# EAGLE board IOB-I2C-MCP23017_array (EAGLE 7.7.0)
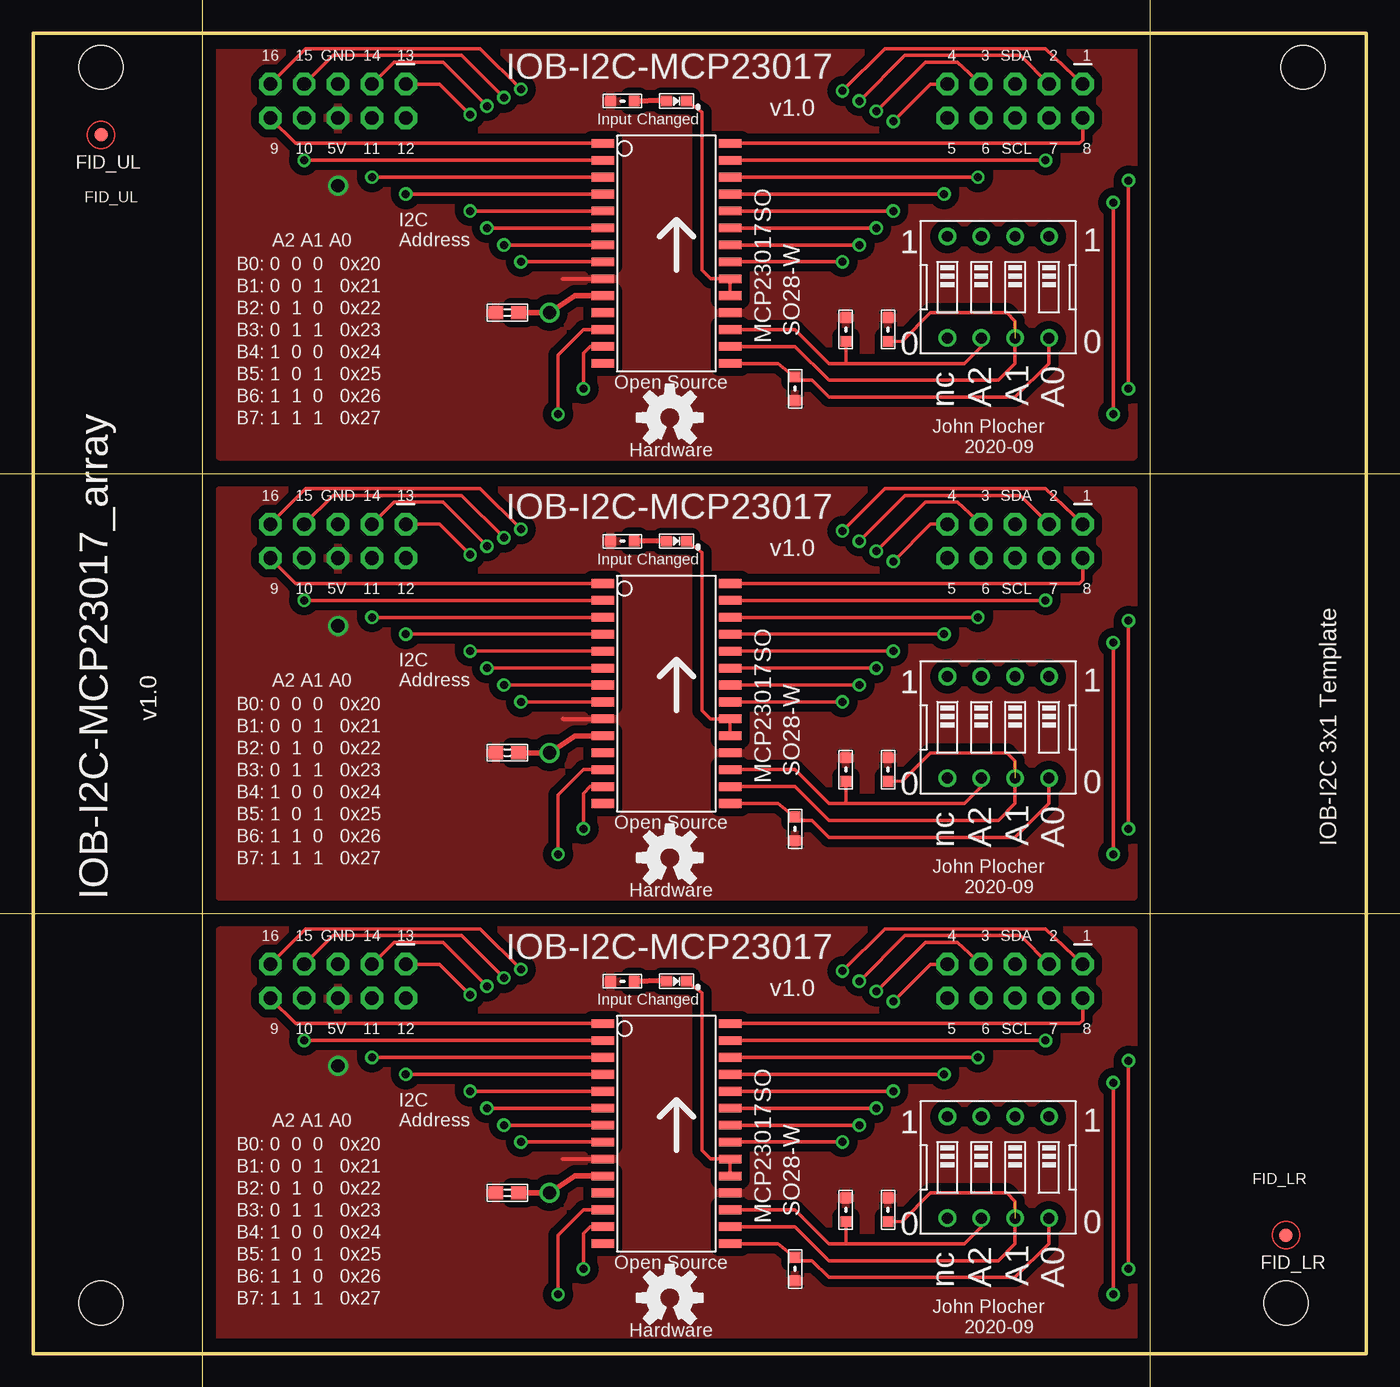
[diagram p0: board, top side]
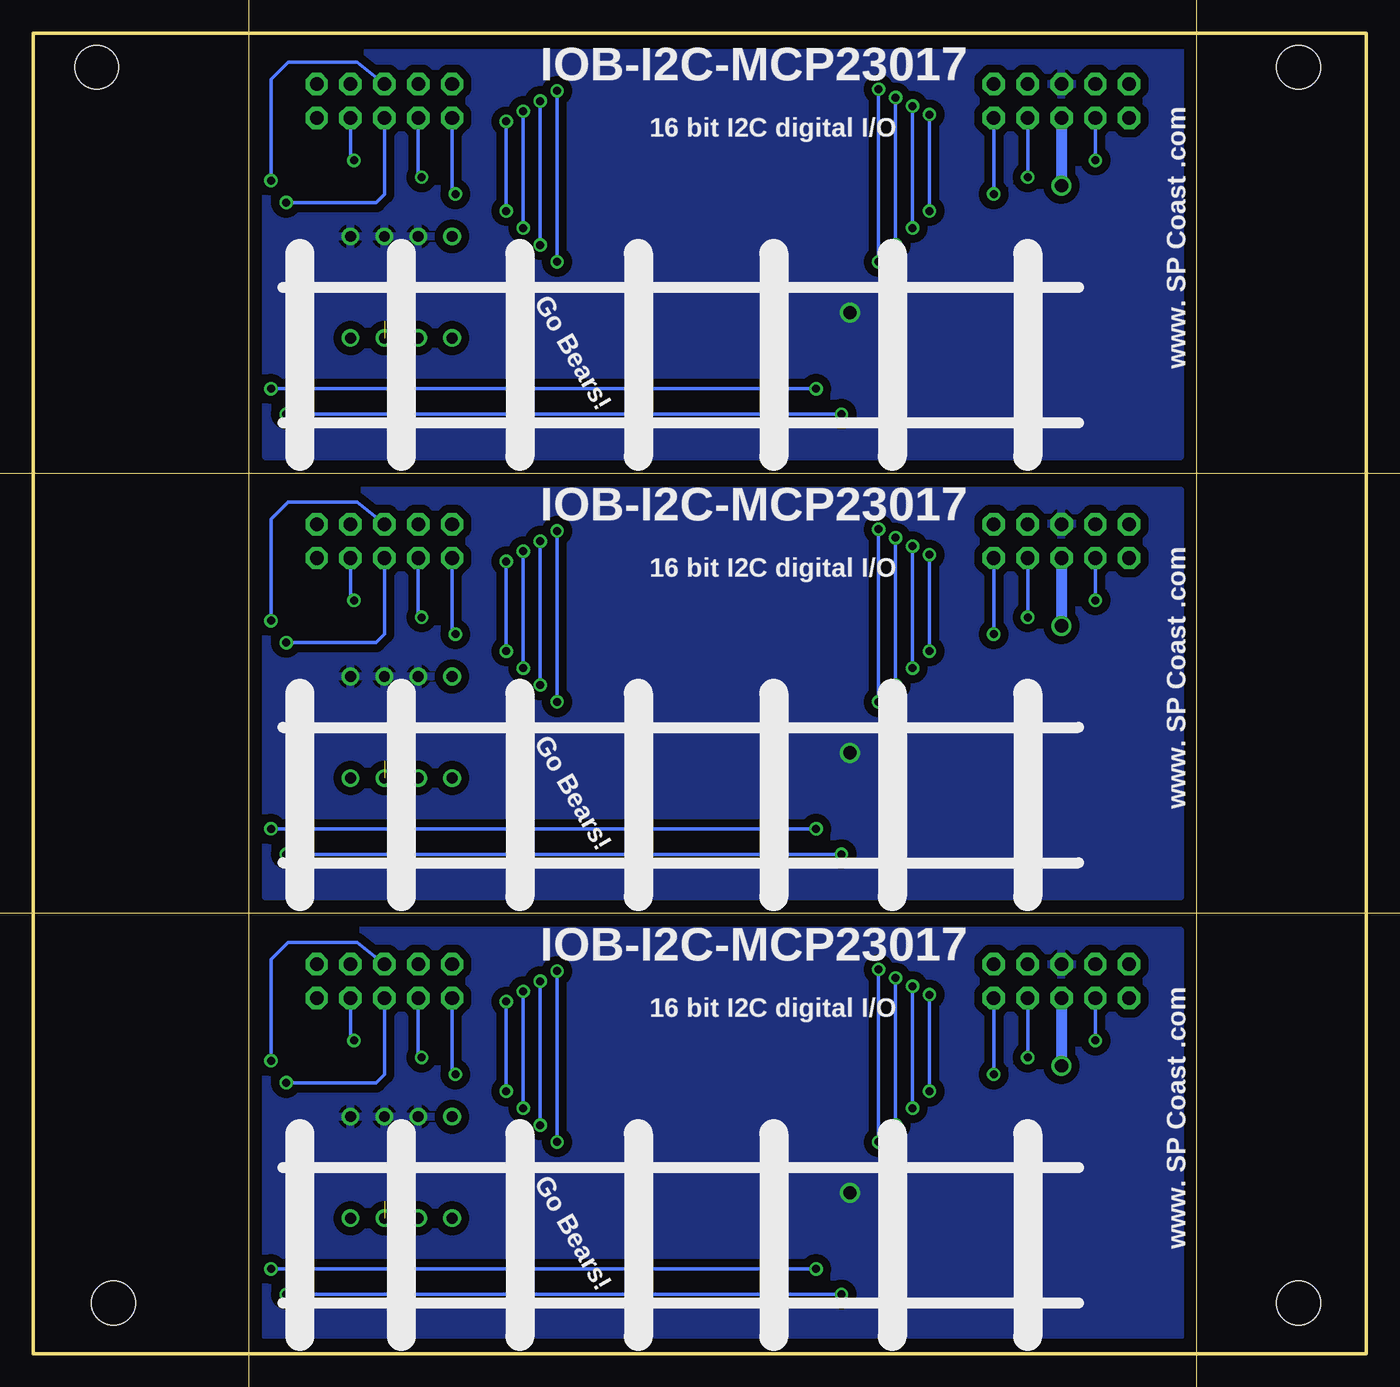
[diagram p1: board, bottom side, seen from below]

Size 100 x 99.06 mm. Coordinates in mm from the lower left corner, seen from the top.
Copper layers (1*16): Top 0.035mm / dielectric 1.5mm / Bottom 0.035mm
Design rules "default": minimum track width 10mil, minimum drill 0.6mm, track to track 8mil, track to pad 8mil, pad to pad 8mil, via to via 8mil, smd to smd 8mil, copper to edge 40mil, drill to drill 8mil, minimum pad ring 10mil, minimum via ring 8mil, stop-mask expansion 4mil, vias tented up to drill 0mil, thermal gap 10mil
Milling: 2 lines

## Footprints (pad centres in the part's own frame; a part is rotated, then mirrored left to right if it is on the bottom)
I2C-EXPANDER = drill 1.016 pad 1.676 octagon: 1 30.48,1.27; 2 27.94,1.27; 3 22.86,1.27; 4 20.32,1.27; 5 20.32,-1.27; 6 22.86,-1.27; 7 27.94,-1.27; 8 30.48,-1.27; 9 -30.48,-1.27; 10 -27.94,-1.27; 11 -22.86,-1.27; 12 -20.32,-1.27; 13 -20.32,1.27; 14 -22.86,1.27; 15 -27.94,1.27; 16 -30.48,1.27; GND -25.4,1.27; SCL 25.4,-1.27; SDA 25.4,1.27; VCC -25.4,-1.27
0603-CAP = smd 1.1 x 1: 1 -0.85,0; 2 0.85,0
FIDUCIAL_1MM = smd 1 x 1: 1 0,0
SO28W = smd 0.65 x 1.7: 1 -7.62,-4.78; 2 -6.35,-4.78; 3 -5.08,-4.78; 4 -3.81,-4.78; 5 -2.54,-4.78; 6 -1.27,-4.78; 7 0,-4.78; 8 1.27,-4.78; 9 2.54,-4.78; 10 3.81,-4.78; 11 5.08,-4.78; 12 6.35,-4.78; 13 7.62,-4.78; 14 8.89,-4.78; 15 8.89,4.78; 16 7.62,4.78; 17 6.35,4.78; 18 5.08,4.78; 19 3.81,4.78; 20 2.54,4.78; 21 1.27,4.78; 22 0,4.78; 23 -1.27,4.78; 24 -2.54,4.78; 25 -3.81,4.78; 26 -5.08,4.78; 27 -6.35,4.78; 28 -7.62,4.78
0603-LED = smd 0.8 x 0.8: A 0.75,0; C -0.75,0
0603-RES = smd 0.813 x 0.813: 1 -0.889,0; 2 0.889,0
EDG-04 = drill 0.813: 1 -3.81,-3.81; 2 -1.27,-3.81; 3 1.27,-3.81; 4 3.81,-3.81; 5 3.81,3.81; 6 1.27,3.81; 7 -1.27,3.81; 8 -3.81,3.81
BOARD-TEMPLATE-IOB-I2C-3X1-ARRAY = hole 3.3: 5.08,96.52; 95.25,96.52; 93.98,3.81; 5.08,3.81

## Placement (x,y rotation side)
BOARDX11  CONNECTOR-I2C-EXPANDER  [I2C-EXPANDER]  48.26,27.94 0 top
BOARDX12  CONNECTOR-I2C-EXPANDER  [I2C-EXPANDER]  48.26,60.96 0 top
BOARDX13  CONNECTOR-I2C-EXPANDER  [I2C-EXPANDER]  48.26,93.98 0 top
C1X11  0.1uF  [0603-CAP]  35.56,12.06 0 top
C1X12  0.1uF  [0603-CAP]  35.56,45.09 0 top
C1X13  0.1uF  [0603-CAP]  35.56,78.11 0 top
FID_LR  FIDUCIAL  [FIDUCIAL_1MM]  93.98,8.89 0 top
FID_UL  FIDUCIAL  [FIDUCIAL_1MM]  5.08,91.44 0 top
IC1X11  MCP23017SO  [SO28W]  47.5,17.14 270 top
IC1X12  MCP23017SO  [SO28W]  47.5,50.16 270 top
IC1X13  MCP23017SO  [SO28W]  47.5,83.19 270 top
LED1X11  G  [0603-LED]  48.26,27.94 180 top
LED1X12  G  [0603-LED]  48.26,60.96 180 top
LED1X13  G  [0603-LED]  48.26,93.98 180 top
OSHW1X11  DOC-OSHW-LOGO-M  [OSHW-LOGO-M]  47.75,4.19 0 top
OSHW1X12  DOC-OSHW-LOGO-M  [OSHW-LOGO-M]  47.75,37.21 0 top
OSHW1X13  DOC-OSHW-LOGO-M  [OSHW-LOGO-M]  47.75,70.23 0 top
R1X11  10K  [0603-RES]  57.15,6.35 270 top
R1X12  10K  [0603-RES]  57.15,39.37 270 top
R1X13  10K  [0603-RES]  57.15,72.39 270 top
R2X11  10K  [0603-RES]  64.14,10.79 90 top
R2X12  10K  [0603-RES]  64.14,43.81 90 top
R2X13  10K  [0603-RES]  64.14,76.83 90 top
R3X11  10K  [0603-RES]  60.96,10.79 90 top
R3X12  10K  [0603-RES]  60.96,43.81 90 top
R3X13  10K  [0603-RES]  60.96,76.83 90 top
R4X11  4k7  [0603-RES]  44.2,27.94 180 top
R4X12  4k7  [0603-RES]  44.2,60.96 180 top
R4X13  4k7  [0603-RES]  44.2,93.98 180 top
SW1X11  SPSTx4  [EDG-04]  72.39,13.97 180 top
SW1X12  SPSTx4  [EDG-04]  72.39,46.99 180 top
SW1X13  SPSTx4  [EDG-04]  72.39,80.01 180 top
U$5X1  BOARD  [BOARD-TEMPLATE-IOB-I2C-3X1-ARRAY]  0,0 0 top

## Library data of the parts
BOARDX11-BOARDX13 C1X11-C1X13 FID_LR FID_UL LED1X11-LED1X13 OSHW1X11-OSHW1X13 R1X11-R1X13 R2X11-R2X13 R3X11-R3X13 R4X11-R4X13 SW1X11-SW1X13 U$5X1 = SPCoast
IC1X11-IC1X13 = microchip

## Nets
A0X11: IC1X11.15 R1X11.1 SW1X11.8
A0X12: IC1X12.15 R1X12.1 SW1X12.8
A0X13: IC1X13.15 R1X13.1 SW1X13.8
A1X11: IC1X11.16 R2X11.1 SW1X11.7
A1X12: IC1X12.16 R2X12.1 SW1X12.7
A1X13: IC1X13.16 R2X13.1 SW1X13.7
A3X11: IC1X11.17 R3X11.1 SW1X11.6
A3X12: IC1X12.17 R3X12.1 SW1X12.6
A3X13: IC1X13.17 R3X13.1 SW1X13.6
GNDX11: BOARDX11.GND C1X11.2 IC1X11.10 SW1X11.1 SW1X11.2 SW1X11.3
GNDX12: BOARDX12.GND C1X12.2 IC1X12.10 SW1X12.1 SW1X12.2 SW1X12.3
GNDX13: BOARDX13.GND C1X13.2 IC1X13.10 SW1X13.1 SW1X13.2 SW1X13.3
N$1X11: LED1X11.A R4X11.1
N$1X12: LED1X12.A R4X12.1
N$1X13: LED1X13.A R4X13.1
N$2X11: IC1X11.19 IC1X11.20 LED1X11.C
N$2X12: IC1X12.19 IC1X12.20 LED1X12.C
N$2X13: IC1X13.19 IC1X13.20 LED1X13.C
P1X11: BOARDX11.1 IC1X11.21
P1X12: BOARDX12.1 IC1X12.21
P1X13: BOARDX13.1 IC1X13.21
P2X11: BOARDX11.2 IC1X11.22
P2X12: BOARDX12.2 IC1X12.22
P2X13: BOARDX13.2 IC1X13.22
P3X11: BOARDX11.3 IC1X11.23
P3X12: BOARDX12.3 IC1X12.23
P3X13: BOARDX13.3 IC1X13.23
P4X11: BOARDX11.4 IC1X11.24
P4X12: BOARDX12.4 IC1X12.24
P4X13: BOARDX13.4 IC1X13.24
P5X11: BOARDX11.5 IC1X11.25
P5X12: BOARDX12.5 IC1X12.25
P5X13: BOARDX13.5 IC1X13.25
P6X11: BOARDX11.6 IC1X11.26
P6X12: BOARDX12.6 IC1X12.26
P6X13: BOARDX13.6 IC1X13.26
P7X11: BOARDX11.7 IC1X11.27
P7X12: BOARDX12.7 IC1X12.27
P7X13: BOARDX13.7 IC1X13.27
P8X11: BOARDX11.8 IC1X11.28
P8X12: BOARDX12.8 IC1X12.28
P8X13: BOARDX13.8 IC1X13.28
P9X11: BOARDX11.9 IC1X11.1
P9X12: BOARDX12.9 IC1X12.1
P9X13: BOARDX13.9 IC1X13.1
P10X11: BOARDX11.10 IC1X11.2
P10X12: BOARDX12.10 IC1X12.2
P10X13: BOARDX13.10 IC1X13.2
P11X11: BOARDX11.11 IC1X11.3
P11X12: BOARDX12.11 IC1X12.3
P11X13: BOARDX13.11 IC1X13.3
P12X11: BOARDX11.12 IC1X11.4
P12X12: BOARDX12.12 IC1X12.4
P12X13: BOARDX13.12 IC1X13.4
P13X11: BOARDX11.13 IC1X11.5
P13X12: BOARDX12.13 IC1X12.5
P13X13: BOARDX13.13 IC1X13.5
P14X11: BOARDX11.14 IC1X11.6
P14X12: BOARDX12.14 IC1X12.6
P14X13: BOARDX13.14 IC1X13.6
P15X11: BOARDX11.15 IC1X11.7
P15X12: BOARDX12.15 IC1X12.7
P15X13: BOARDX13.15 IC1X13.7
P16X11: BOARDX11.16 IC1X11.8
P16X12: BOARDX12.16 IC1X12.8
P16X13: BOARDX13.16 IC1X13.8
SCLX11: BOARDX11.SCL IC1X11.12
SCLX12: BOARDX12.SCL IC1X12.12
SCLX13: BOARDX13.SCL IC1X13.12
SDAX11: BOARDX11.SDA IC1X11.13
SDAX12: BOARDX12.SDA IC1X12.13
SDAX13: BOARDX13.SDA IC1X13.13
VCCX11: BOARDX11.VCC C1X11.1 IC1X11.9 IC1X11.18 R1X11.2 R2X11.2 R3X11.2 R4X11.2
VCCX12: BOARDX12.VCC C1X12.1 IC1X12.9 IC1X12.18 R1X12.2 R2X12.2 R3X12.2 R4X12.2
VCCX13: BOARDX13.VCC C1X13.1 IC1X13.9 IC1X13.18 R1X13.2 R2X13.2 R3X13.2 R4X13.2

## Tracks (layer width: path | path; a pad name or v marks a point on that pad's centre or on a via)
A0X11
  Top 0.254: IC1X11.15 55.88,8.26 R1X11.1 57.37,6.99 58.42,6.99 59.69,5.71 73.66,5.71 76.2,8.26 SW1X11.8
A0X12
  Top 0.254: IC1X12.15 55.88,41.27 R1X12.1 57.37,40.01 58.42,40.01 59.69,38.73 73.66,38.73 76.2,41.27 SW1X12.8
A0X13
  Top 0.254: IC1X13.15 55.88,74.3 R1X13.1 57.37,73.03 58.42,73.03 59.69,71.75 73.66,71.75 76.2,74.3 SW1X13.8
A1X11  (1 unrouted)
  Top 0.254: IC1X11.16 57.15,9.53 59.69,6.99 72.39,6.99 73.66,8.26 73.66,11.43 73.03,12.06 67.31,12.06 65.19,9.95 R2X11.1
A1X12  (1 unrouted)
  Top 0.254: IC1X12.16 57.15,42.55 59.69,40.01 72.39,40.01 73.66,41.27 73.66,44.45 73.03,45.09 67.31,45.09 65.19,42.97 R2X12.1
A1X13  (1 unrouted)
  Top 0.254: IC1X13.16 57.15,75.56 59.69,73.03 72.39,73.03 73.66,74.3 73.66,77.47 73.03,78.11 67.31,78.11 65.19,75.98 R2X13.1
A3X11
  Top 0.254: IC1X11.17 57.15,10.79 59.69,8.26 60.96,8.26 | 60.96,8.26 69.85,8.26 71.12,9.53 SW1X11.6 | R3X11.1 60.96,8.26
A3X12
  Top 0.254: IC1X12.17 57.15,43.81 59.69,41.27 60.96,41.27 | 60.96,41.27 69.85,41.27 71.12,42.55 SW1X12.6 | R3X12.1 60.96,41.27
A3X13
  Top 0.254: IC1X13.17 57.15,76.83 59.69,74.3 60.96,74.3 | 60.96,74.3 69.85,74.3 71.12,75.56 SW1X13.6 | R3X13.1 60.96,74.3
GNDX11  (via drill 1 pad 1.5)
  Top 0.406: IC1X11.10 40.64,13.34 v38.73,12.06 C1X11.2
  pour Bottom (isolate 0.61): 13.97,31.75 13.97,1.27 82.55,1.27 82.55,31.75
GNDX12  (via drill 1 pad 1.5)
  Top 0.406: IC1X12.10 40.64,46.35 v38.73,45.09 C1X12.2
  pour Bottom (isolate 0.61): 13.97,64.77 13.97,34.29 82.55,34.29 82.55,64.77
GNDX13  (via drill 1 pad 1.5)
  Top 0.406: IC1X13.10 40.64,79.38 v38.73,78.11 C1X13.2
  pour Bottom (isolate 0.61): 13.97,97.79 13.97,67.31 82.55,67.31 82.55,97.79
N$1X11
  Top 0.406: LED1X11.A 47.21,27.99 R4X11.1
N$1X12
  Top 0.406: LED1X12.A 47.21,61.01 R4X12.1
N$1X13
  Top 0.406: LED1X13.A 47.21,94.03 R4X13.1
N$2X11
  Top 0.254: IC1X11.19 IC1X11.20 50.8,14.61 50.16,15.24 50.16,27.09 LED1X11.C
N$2X12
  Top 0.254: IC1X12.19 IC1X12.20 50.8,47.62 50.16,48.26 50.16,60.1 LED1X12.C
N$2X13
  Top 0.254: IC1X13.19 IC1X13.20 50.8,80.64 50.16,81.28 50.16,93.12 LED1X13.C
P1X11  (via drill 0.6 pad 0.9)
  Top 0.254: IC1X11.21 v60.71,15.88 | BOARDX11.1 75.95,31.88 63.88,31.88 v60.71,28.7
  Bottom 0.254: v60.71,28.7 v60.71,15.88
P1X12  (via drill 0.6 pad 0.9)
  Top 0.254: IC1X12.21 v60.71,48.9 | BOARDX12.1 75.95,64.9 63.88,64.9 v60.71,61.72
  Bottom 0.254: v60.71,61.72 v60.71,48.9
P1X13  (via drill 0.6 pad 0.9)
  Top 0.254: IC1X13.21 v60.71,81.92 | BOARDX13.1 75.95,97.92 63.88,97.92 v60.71,94.74
  Bottom 0.254: v60.71,94.74 v60.71,81.92
P2X11  (via drill 0.6 pad 0.9)
  Top 0.254: IC1X11.22 v61.98,17.14 | BOARDX11.2 74.04,31.37 65.41,31.37 v61.98,27.94
  Bottom 0.254: v61.98,27.94 v61.98,17.14
P2X12  (via drill 0.6 pad 0.9)
  Top 0.254: IC1X12.22 v61.98,50.16 | BOARDX12.2 74.04,64.39 65.41,64.39 v61.98,60.96
  Bottom 0.254: v61.98,60.96 v61.98,50.16
P2X13  (via drill 0.6 pad 0.9)
  Top 0.254: IC1X13.22 v61.98,83.19 | BOARDX13.2 74.04,97.41 65.41,97.41 v61.98,93.98
  Bottom 0.254: v61.98,93.98 v61.98,83.19
P3X11  (via drill 0.6 pad 0.9)
  Top 0.254: IC1X11.23 v63.25,18.41 | BOARDX11.3 69.34,30.86 66.93,30.86 v63.25,27.18
  Bottom 0.254: v63.25,27.18 v63.25,18.41
P3X12  (via drill 0.6 pad 0.9)
  Top 0.254: IC1X12.23 v63.25,51.44 | BOARDX12.3 69.34,63.88 66.93,63.88 v63.25,60.2
  Bottom 0.254: v63.25,60.2 v63.25,51.44
P3X13  (via drill 0.6 pad 0.9)
  Top 0.254: IC1X13.23 v63.25,84.45 | BOARDX13.3 69.34,96.9 66.93,96.9 v63.25,93.22
  Bottom 0.254: v63.25,93.22 v63.25,84.45
P4X11  (via drill 0.6 pad 0.9)
  Top 0.254: IC1X11.24 v64.52,19.68 | BOARDX11.4 67.31,29.21 v64.52,26.42
  Bottom 0.254: v64.52,26.42 v64.52,19.68
P4X12  (via drill 0.6 pad 0.9)
  Top 0.254: IC1X12.24 v64.52,52.7 | BOARDX12.4 67.31,62.23 v64.52,59.44
  Bottom 0.254: v64.52,59.44 v64.52,52.7
P4X13  (via drill 0.6 pad 0.9)
  Top 0.254: IC1X13.24 v64.52,85.72 | BOARDX13.4 67.31,95.25 v64.52,92.46
  Bottom 0.254: v64.52,92.46 v64.52,85.72
P5X11  (via drill 0.6 pad 0.9)
  Top 0.254: IC1X11.25 v68.33,20.95
  Bottom 0.254: v68.33,20.95 68.58,21.21 BOARDX11.5
P5X12  (via drill 0.6 pad 0.9)
  Top 0.254: IC1X12.25 v68.33,53.98
  Bottom 0.254: v68.33,53.98 68.58,54.23 BOARDX12.5
P5X13  (via drill 0.6 pad 0.9)
  Top 0.254: IC1X13.25 v68.33,87
  Bottom 0.254: v68.33,87 68.58,87.25 BOARDX13.5
P6X11  (via drill 0.6 pad 0.9)
  Top 0.254: IC1X11.26 v70.87,22.23
  Bottom 0.254: v70.87,22.23 71.12,22.48 BOARDX11.6
P6X12  (via drill 0.6 pad 0.9)
  Top 0.254: IC1X12.26 v70.87,55.24
  Bottom 0.254: v70.87,55.24 71.12,55.5 BOARDX12.6
P6X13  (via drill 0.6 pad 0.9)
  Top 0.254: IC1X13.26 v70.87,88.27
  Bottom 0.254: v70.87,88.27 71.12,88.52 BOARDX13.6
P7X11  (via drill 0.6 pad 0.9)
  Top 0.254: IC1X11.27 v75.95,23.5
  Bottom 0.254: v75.95,23.5 76.2,23.75 BOARDX11.7
P7X12  (via drill 0.6 pad 0.9)
  Top 0.254: IC1X12.27 v75.95,56.52
  Bottom 0.254: v75.95,56.52 76.2,56.77 BOARDX12.7
P7X13  (via drill 0.6 pad 0.9)
  Top 0.254: IC1X13.27 v75.95,89.53
  Bottom 0.254: v75.95,89.53 76.2,89.79 BOARDX13.7
P8X11
  Top 0.254: IC1X11.28 78.49,24.77 78.74,25.02 BOARDX11.8
P8X12
  Top 0.254: IC1X12.28 78.49,57.78 78.74,58.04 BOARDX12.8
P8X13
  Top 0.254: IC1X13.28 78.49,90.81 78.74,91.06 BOARDX13.8
P9X11
  Top 0.254: IC1X11.1 19.68,24.77 BOARDX11.9
P9X12
  Top 0.254: IC1X12.1 19.68,57.78 BOARDX12.9
P9X13
  Top 0.254: IC1X13.1 19.68,90.81 BOARDX13.9
P10X11  (via drill 0.6 pad 0.9)
  Top 0.254: v20.32,23.5 IC1X11.2
  Bottom 0.254: v20.32,23.5 BOARDX11.10
P10X12  (via drill 0.6 pad 0.9)
  Top 0.254: v20.32,56.52 IC1X12.2
  Bottom 0.254: v20.32,56.52 BOARDX12.10
P10X13  (via drill 0.6 pad 0.9)
  Top 0.254: v20.32,89.53 IC1X13.2
  Bottom 0.254: v20.32,89.53 BOARDX13.10
P11X11  (via drill 0.6 pad 0.9)
  Top 0.254: v25.4,22.23 IC1X11.3
  Bottom 0.254: v25.4,22.23 BOARDX11.11
P11X12  (via drill 0.6 pad 0.9)
  Top 0.254: v25.4,55.24 IC1X12.3
  Bottom 0.254: v25.4,55.24 BOARDX12.11
P11X13  (via drill 0.6 pad 0.9)
  Top 0.254: v25.4,88.27 IC1X13.3
  Bottom 0.254: v25.4,88.27 BOARDX13.11
P12X11  (via drill 0.6 pad 0.9)
  Top 0.254: v27.94,20.95 IC1X11.4
  Bottom 0.254: v27.94,20.95 BOARDX11.12
P12X12  (via drill 0.6 pad 0.9)
  Top 0.254: v27.94,53.98 IC1X12.4
  Bottom 0.254: v27.94,53.98 BOARDX12.12
P12X13  (via drill 0.6 pad 0.9)
  Top 0.254: v27.94,87 IC1X13.4
  Bottom 0.254: v27.94,87 BOARDX13.12
P13X11  (via drill 0.6 pad 0.9)
  Top 0.254: v32.77,19.68 IC1X11.5 | BOARDX11.13 30.48,29.21 v32.77,26.92
  Bottom 0.254: v32.77,26.92 v32.77,19.68
P13X12  (via drill 0.6 pad 0.9)
  Top 0.254: v32.77,52.7 IC1X12.5 | BOARDX12.13 30.48,62.23 v32.77,59.94
  Bottom 0.254: v32.77,59.94 v32.77,52.7
P13X13  (via drill 0.6 pad 0.9)
  Top 0.254: v32.77,85.72 IC1X13.5 | BOARDX13.13 30.48,95.25 v32.77,92.96
  Bottom 0.254: v32.77,92.96 v32.77,85.72
P14X11  (via drill 0.6 pad 0.9)
  Top 0.254: v34.04,18.41 IC1X11.6 | BOARDX11.14 27.05,30.86 30.73,30.86 v34.04,27.56
  Bottom 0.254: v34.04,27.56 v34.04,18.41
P14X12  (via drill 0.6 pad 0.9)
  Top 0.254: v34.04,51.44 IC1X12.6 | BOARDX12.14 27.05,63.88 30.73,63.88 v34.04,60.58
  Bottom 0.254: v34.04,60.58 v34.04,51.44
P14X13  (via drill 0.6 pad 0.9)
  Top 0.254: v34.04,84.45 IC1X13.6 | BOARDX13.14 27.05,96.9 30.73,96.9 v34.04,93.6
  Bottom 0.254: v34.04,93.6 v34.04,84.45
P15X11  (via drill 0.6 pad 0.9)
  Top 0.254: v35.31,17.14 IC1X11.7 | BOARDX11.15 22.48,31.37 32.13,31.37 v35.31,28.19
  Bottom 0.254: v35.31,28.19 v35.31,17.14
P15X12  (via drill 0.6 pad 0.9)
  Top 0.254: v35.31,50.16 IC1X12.7 | BOARDX12.15 22.48,64.39 32.13,64.39 v35.31,61.21
  Bottom 0.254: v35.31,61.21 v35.31,50.16
P15X13  (via drill 0.6 pad 0.9)
  Top 0.254: v35.31,83.19 IC1X13.7 | BOARDX13.15 22.48,97.41 32.13,97.41 v35.31,94.23
  Bottom 0.254: v35.31,94.23 v35.31,83.19
P16X11  (via drill 0.6 pad 0.9)
  Top 0.254: v36.58,15.88 IC1X11.8 | BOARDX11.16 20.45,31.88 33.53,31.88 v36.58,28.83
  Bottom 0.254: v36.58,28.83 v36.58,15.88
P16X12  (via drill 0.6 pad 0.9)
  Top 0.254: v36.58,48.9 IC1X12.8 | BOARDX12.16 20.45,64.9 33.53,64.9 v36.58,61.85
  Bottom 0.254: v36.58,61.85 v36.58,48.9
P16X13  (via drill 0.6 pad 0.9)
  Top 0.254: v36.58,81.92 IC1X13.8 | BOARDX13.16 20.45,97.92 33.53,97.92 v36.58,94.87
  Bottom 0.254: v36.58,94.87 v36.58,81.92
SCLX11  (via drill 0.6 pad 0.9)
  Top 0.254: v81.03,20.32 v81.03,4.45 | v39.37,4.45 39.37,8.89 41.27,10.79 IC1X11.12
  Bottom 0.254: BOARDX11.SCL 73.66,20.95 74.3,20.32 v81.03,20.32 | v81.03,4.45 v39.37,4.45
SCLX12  (via drill 0.6 pad 0.9)
  Top 0.254: v81.03,53.34 v81.03,37.47 | v39.37,37.47 39.37,41.91 41.27,43.81 IC1X12.12
  Bottom 0.254: BOARDX12.SCL 73.66,53.98 74.3,53.34 v81.03,53.34 | v81.03,37.47 v39.37,37.47
SCLX13  (via drill 0.6 pad 0.9)
  Top 0.254: v81.03,86.36 v81.03,70.48 | v39.37,70.48 39.37,74.93 41.27,76.83 IC1X13.12
  Bottom 0.254: BOARDX13.SCL 73.66,87 74.3,86.36 v81.03,86.36 | v81.03,70.48 v39.37,70.48
SDAX11  (via drill 0.6 pad 0.9)
  Top 0.254: v82.17,21.97 v82.17,6.35 | v41.27,6.35 41.27,9.02 41.78,9.53 IC1X11.13
  Bottom 0.254: BOARDX11.SDA 75.69,30.86 80.9,30.86 82.17,29.59 v82.17,21.97 | v82.17,6.35 v41.27,6.35
SDAX12  (via drill 0.6 pad 0.9)
  Top 0.254: v82.17,54.99 v82.17,39.37 | v41.27,39.37 41.27,42.04 41.78,42.55 IC1X12.13
  Bottom 0.254: BOARDX12.SDA 75.69,63.88 80.9,63.88 82.17,62.61 v82.17,54.99 | v82.17,39.37 v41.27,39.37
SDAX13  (via drill 0.6 pad 0.9)
  Top 0.254: v82.17,88.01 v82.17,72.39 | v41.27,72.39 41.27,75.06 41.78,75.56 IC1X13.13
  Bottom 0.254: BOARDX13.SDA 75.69,96.9 80.9,96.9 82.17,95.63 v82.17,88.01 | v82.17,72.39 v41.27,72.39
VCCX11  (via drill 1 pad 1.5)
  Top 0.305: 39.74,14.61 IC1X11.9
  Bottom 0.813: BOARDX11.VCC v22.86,21.59
  pour Top (isolate 0.61, rank 3): 13.97,31.75 13.97,1.27 82.55,1.27 82.55,31.75
VCCX12  (via drill 1 pad 1.5)
  Top 0.305: 39.74,47.62 IC1X12.9
  Bottom 0.813: BOARDX12.VCC v22.86,54.61
  pour Top (isolate 0.61, rank 3): 13.97,64.77 13.97,34.29 82.55,34.29 82.55,64.77
VCCX13  (via drill 1 pad 1.5)
  Top 0.305: 39.74,80.64 IC1X13.9
  Bottom 0.813: BOARDX13.VCC v22.86,87.63
  pour Top (isolate 0.61, rank 3): 13.97,97.79 13.97,67.31 82.55,67.31 82.55,97.79

## Text on the board
tPlace: IOB-I2C-MCP23017 | v1.0 | Input Changed | A2 A1 A0 | I2C / Address | 1 | 1 | B0: 0 0 0 0x20 | B1: 0 0 1 0x21 | B2: 0 1 0 0x22 | B3: 0 1 1 0x23 | MCP23017SO | SO28-W | B4: 1 0 0 0x24 | 0 | 0 | B5: 1 0 1 0x25 | Open Source | B6: 1 1 0 0x26 | nc | A2 | A1 | A0 | B7: 1 1 1 0x27 | John Plocher | 2020-09 | Hardware | IOB-I2C-MCP23017 | v1.0 | Input Changed | A2 A1 A0 | I2C / Address | 1 | 1 | B0: 0 0 0 0x20 | v1.0 | B1: 0 0 1 0x21 | B2: 0 1 0 0x22 | B3: 0 1 1 0x23 | MCP23017SO | SO28-W | B4: 1 0 0 0x24 | 0 | 0 | B5: 1 0 1 0x25 | Open Source | B6: 1 1 0 0x26 | nc | A2 | A1 | A0 | B7: 1 1 1 0x27 | John Plocher | 2020-09 | Hardware | IOB-I2C-MCP23017 | v1.0 | Input Changed | A2 A1 A0 | I2C / Address | 1 | 1 | B0: 0 0 0 0x20 | B1: 0 0 1 0x21 | B2: 0 1 0 0x22 | B3: 0 1 1 0x23 | MCP23017SO | SO28-W | B4: 1 0 0 0x24 | 0 | 0 | B5: 1 0 1 0x25 | Open Source | B6: 1 1 0 0x26 | nc | A2 | A1 | A0 | B7: 1 1 1 0x27 | John Plocher | 2020-09 | Hardware
bPlace: IOB-I2C-MCP23017 | www. SP Coast .com | 16 bit I2C digital I/O | Go Bears! | IOB-I2C-MCP23017 | www. SP Coast .com | 16 bit I2C digital I/O | Go Bears! | IOB-I2C-MCP23017 | www. SP Coast .com | 16 bit I2C digital I/O | Go Bears!
_tNames: BOARD | R4 | LED1 | IC1 | SW1 | C1 | R3 | R2 | R1 | BOARD | R4 | LED1 | IC1 | SW1 | C1 | R3 | R2 | R1 | BOARD | R4 | LED1 | IC1 | SW1 | C1 | R3 | R2 | R1